# Altium PCB PCB1.PcbDoc
Units mil, origin at the board's own origin, x right, y up, seen from the top; angles counter-clockwise.
Board outline 6000 x 4000 mil, 2 copper layers (Top Layer, Bottom Layer); 4 components, 7 nets, 69 pads, 0 vias.
Unrouted connection lines stored in the file: 20.
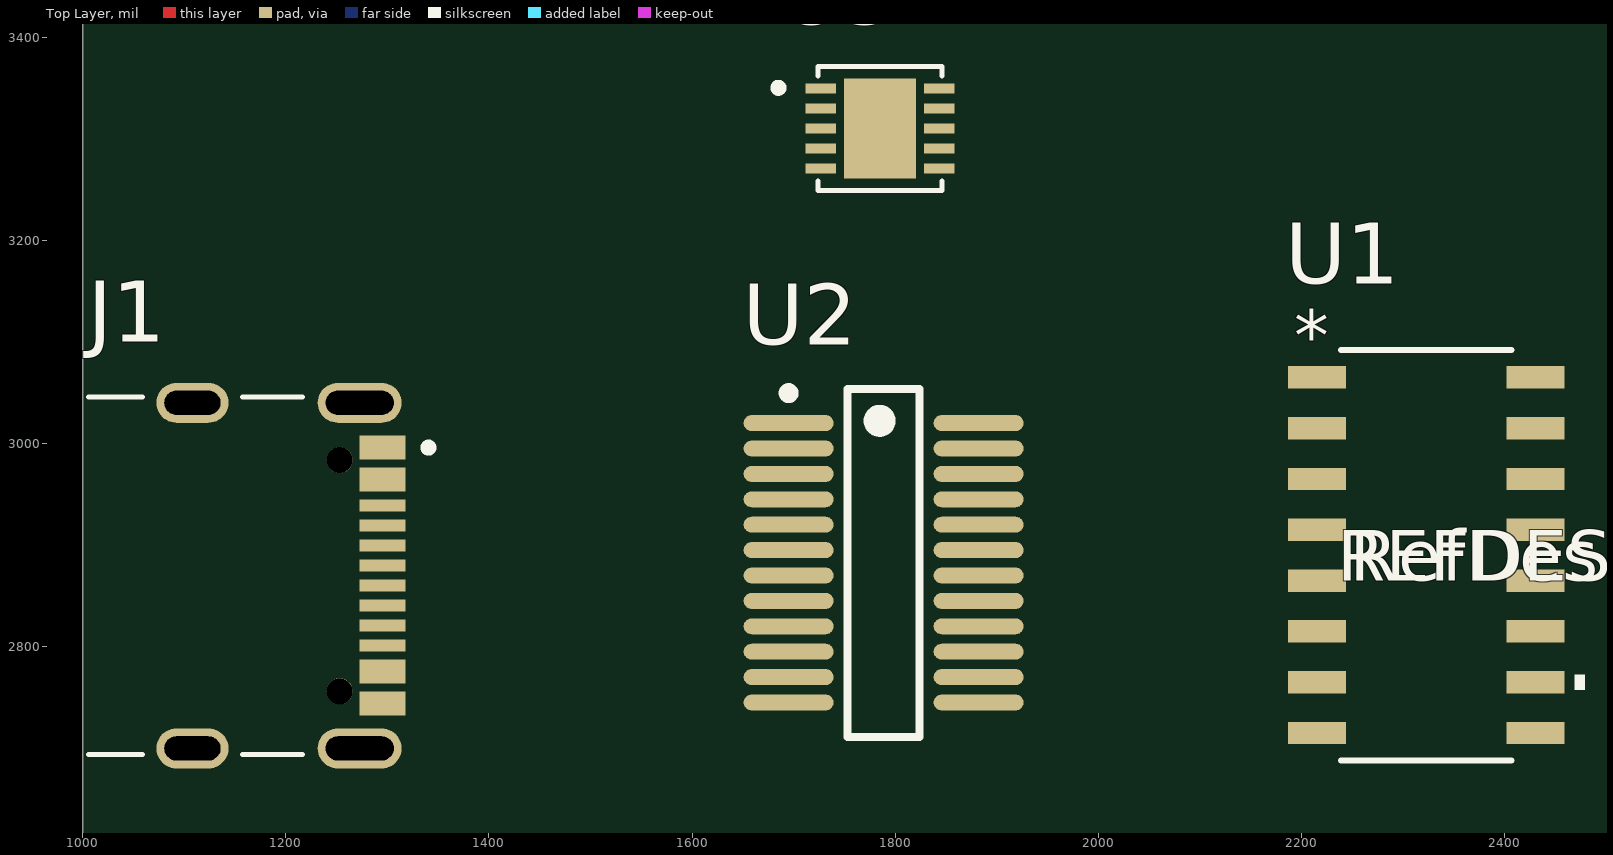
[diagram p0: Top Layer view]
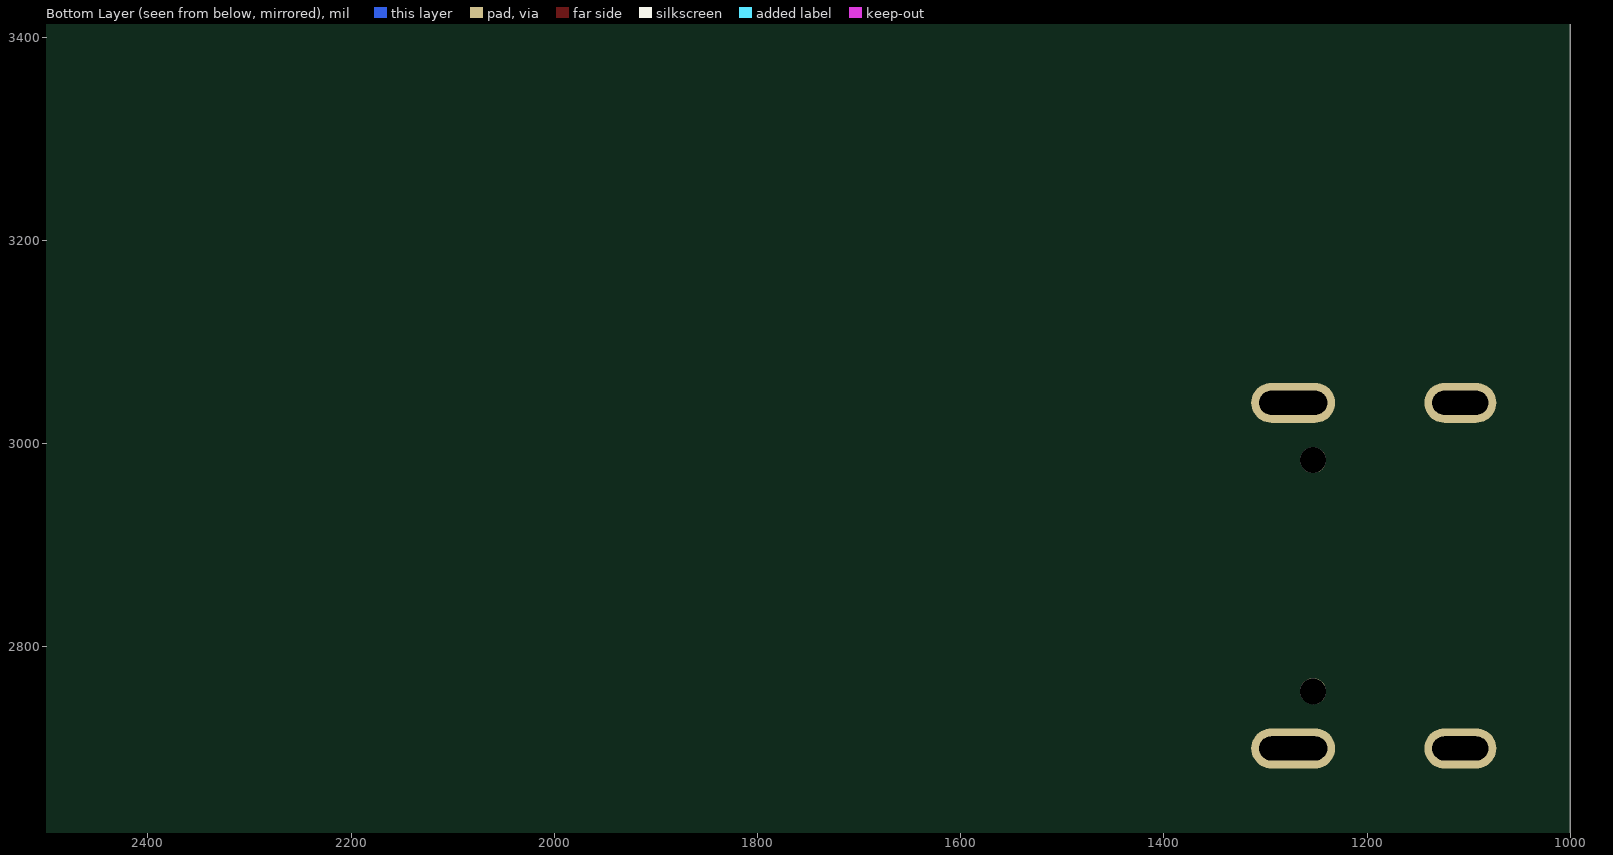
[diagram p1: Bottom Layer view, seen from below]

## Layer stack, top to bottom
Top Solder: solder mask 0.4, Solder Resist, Dk 3.5
Top Layer: signal copper 1.4
Dielectric 1: dielectric 12.6, FR-4, Dk 4.8
Bottom Layer: signal copper 1.4
Bottom Solder: solder mask 0.4, Solder Resist, Dk 3.5

## Board outline
1000,1000 7000,1000 7000,5000 1000,5000

## Design rules (kind name [scope] priority, off if disabled: settings)
Clearance [All] p1: gap=10 ignorepadtopadclearanceinfootprint=FALSE
PolygonConnect [All] p1: connectstyle=Relief reliefconductorwidth=10 reliefentries=4 polygonreliefangle="90 Angle" airgapwidth=10
RoutingVias [All] p1: holewidth=28 width=50 viastyle="Through Hole" minholewidth=28 minwidth=50 maxholewidth=28 maxwidth=50
SolderMaskExpansion [All] p1: expansion=4 istentingtop=FALSE
SupplyNets "Schematic Supply Nets_4" [InNet('GND')] p1: voltage=0.000
SupplyNets "Schematic Supply Nets_3" [InNet('+1V2')] p2: voltage=0.000
SupplyNets "Schematic Supply Nets_2" [InNet('+3V3')] p3: voltage=0.000
SupplyNets "Schematic Supply Nets_1" [InNet('+5V0')] p4: voltage=0.000
SupplyNets "Schematic Supply Nets" [InNet('+1V8')] p5: voltage=0.000
Width [All] p1: maxlimit=10 minlimit=10 preferedwidth=10
30 further rules are at their usual default settings.

## Components (designator, comment, footprint, x,y, rotation, side; value= is the part's Value field where it differs from the comment)
J1 "UJ20-C-H-G-SMT-1-P16-TR" SAMESKY_UJ20-C-H-G-SMT-1-P16-TR 1005.83,2869.84 r270 top
U1 "DAC0808LCMX/NOPB" M16A_TEX 2322.5,2890 r0 top
U2 "FT240XS-R" SSOP-24_N 1788.5,2882.5 r0 top
U3 "NCV8154MW120180TBG" SON50P300X300X100-11N 1785,3310 r0 top

## Footprints (in the part's own frame and the unit in brackets; to place one, negate y for a bottom-side part, rotate by r counter-clockwise, add the part's x,y. Pads: shape width x height; smd on the part's side, far side on the other; paste and mask are expansions set on the pad)
M16A_TEX [mil]
  rect 57x22 smd paste+0 mask+0: 1(-107.5,175) 2(-107.5,125) 3(-107.5,75) 4(-107.5,25) 5(-107.5,-25) 6(-107.5,-75) 7(-107.5,-125) 8(-107.5,-175) 9(107.5,-175) 10(107.5,-125) 11(107.5,-75) 12(107.5,-25) 13(107.5,25) 14(107.5,75) 15(107.5,125) 16(107.5,175)
  silkscreen extent -84,-202 156,202, body extent -122,-197 122,197, height 69
SAMESKY_UJ20-C-H-G-SMT-1-P16-TR [mm]
  rect 0.6x1.15 smd: A1_B12(-3.2,7.345) A4_B9(-2.4,7.345) B1_A12(3.2,7.345) B4_A9(2.4,7.345)
  rect 0.3x1.15 smd: A5(-1.25,7.345) A6(-0.25,7.345) A7(0.25,7.345) A8(1.25,7.345) B5(1.75,7.345) B6(0.75,7.345) B7(-0.75,7.345) B8(-1.75,7.345)
  oval 1x2.1 hole 0.6 slot 1.7 at 90 deg: SH1(-4.32,6.78) SH2(4.32,6.78)
  oval 1x1.8 hole 0.6 slot 1.4 at 90 deg: SH3(-4.32,2.6) SH4(4.32,2.6)
  round 0.65 hole 0.65 unplated: ""(-2.89,6.28) ""(2.89,6.28)
  silkscreen extent -4.47,0 4.47,8.6, body extent -4.47,0 4.47,7.6, height 3.31
SON50P300X300X100-11N [mm]
  rect 0.76x0.26 smd: 1(-1.48,1) 2(-1.48,0.5) 3(-1.48,0) 4(-1.48,-0.5) 5(-1.48,-1) 6(1.48,-1) 7(1.48,-0.5) 8(1.48,0) 9(1.48,0.5) 10(1.48,1)
  rect 1.8x2.5 smd paste-2: 11(0,0)
  silkscreen extent -2.64,-1.55 1.55,1.55, body extent -1.5,-1.5 1.5,1.5, height 1
SSOP-24_N [mm] "SOP, 24-Leads, Body 8.6x3.9mm, Pitch 0.635mm, IPC Medium Density"
  oval 2.25x0.4 smd: 1(-2.375,3.492) 2(-2.375,2.857) 3(-2.375,2.222) 4(-2.375,1.587) 5(-2.375,0.953) 6(-2.375,0.318) 7(-2.375,-0.318) 8(-2.375,-0.953) 9(-2.375,-1.587) 10(-2.375,-2.222) 11(-2.375,-2.857) 12(-2.375,-3.492) 13(2.375,-3.492) 14(2.375,-2.857) 15(2.375,-2.222) 16(2.375,-1.587) 17(2.375,-0.953) 18(2.375,-0.318) 19(2.375,0.318) 20(2.375,0.953) 21(2.375,1.587) 22(2.375,2.222) 23(2.375,2.857) 24(2.375,3.492)
  silkscreen extent -2.5,-4.35 0.9,4.37, body extent -1.99,-4.37 1.99,4.37, height 1.76

## Part data
J1: "USB-C (USB TYPE-C) USB 2.0 Receptacle Connector 24 (16+8 Dummy) Position Surface Mount, Right Angle; Through Hole", Package=None, Check_prices=https://www.snapeda.com/parts/UJ20-C-H-G-SMT-1-P16-TR/Same+Sky/view-part/?ref=eda, MF="Same Sky", MP=UJ20-C-H-G-SMT-1-P16-TR, SnapEDA_Link=https://www.snapeda.com/parts/UJ20-C-H-G-SMT-1-P16-TR/Same+Sky/view-part/?ref=snap
U1: library part DAC0808LCMXNOPB, "8-Bit D/A Converter 16-SOIC 0 to 70", Manufacturer_Name="Texas Instruments", Copyright="Copyright (C) 2025 Ultra Librarian. All rights reserved.", Manufacturer_Part_Number=DAC0808LCMX/NOPB, RefDes=RefDes, Type=Type
U2: library part CMP-0248-00018-2, "USB to Parallel FIFO Interface Chip, UHCI/OHCI/EHCI Compatible, USB 2.0 Compatible, -40 to +85 degC, 24-Pin SSOP, Pb-Free, Tape and Reel", Manufacturer=FTDI, Code_JEDEC=MO-137-AE, ComponentLink1Description="Manufacturer URL", ComponentLink1URL=http://www.ftdichip.com/, ComponentLink2Description=Datasheet, ComponentLink2URL=http://www.ftdichip.com/Support/Documents/DataSheets/ICs/DS_FT240X.pdf, ComponentLink3Description="FT240X Product Page", ComponentLink3URL=www.ftdichip.com/Products/ICs/FT240X.html, DatasheetVersion="ver 1.3, Feb-2013", PackageDescription="24-Pin Shrink Small Outline Package, 0.025\" Lead Pitch, 150mil Wide Body", PackageReference=SSOP-24, PackageVersion=Feb-13, PartNumber=FT240XS-R, RevisionNote="DatasheetVersion updated to 1.3 Feb-2013"

## Nets (pads, with @x,y where several pads share a name; then routed paths per layer and width w, separated by ;. In a path a pad name is that pad's centre, name@x,y a point inside that pad or via, vN(x,y) a via of type N, cw(c..) or ccw(c..) an arc to the next point about the centre after c; other vN are vias at no path point)
+1V2: U3.2
+1V8: U3.3
+3V3: U2.15
+5V0: J1.A4_B9 J1.B4_A9 U2.18 U3.7 U3.8 U3.9 U3.10
GND: J1.A1_B12 J1.B1_A12 J1.SH1 J1.SH2 J1.SH3 J1.SH4 U2.6 U2.19 U3.1 U3.4 U3.11
NetJ1_A6: J1.A6 J1.B6 U2.13
NetJ1_A7: J1.A7 J1.B7 U2.14
pads on no net: J1. J1.A5 J1.A8 J1.B5 J1.B8 U1.1 U1.2 U1.3 U1.4 U1.5 U1.6 U1.7 U1.8 U1.9 U1.10 U1.11 U1.12 U1.13 U1.14 U1.15 U1.16 U2.1 U2.2 U2.3 U2.4 U2.5 U2.7 U2.8 U2.9 U2.10 U2.11 U2.12 U2.16 U2.17 U2.20 U2.21 U2.22 U2.23 U2.24 U3.5 U3.6

## Text inside footprints (layer, text, board x,y; h text height)
J1: Mechanical 13 "PCB EDGE" at 1013.7,2665.12 h39.37 r270
U1: Mechanical 13 "RefDes2" at 2235,2865 h50; Mechanical 13 "*" at 2246,3034 h50; Top Overlay "RefDes" at 2247.5,2865 h50; Top Overlay "*" at 2192.5,3082 h50; Top Overlay "REFDES" at 2235,2865 h50